# Allegro board adc.brd
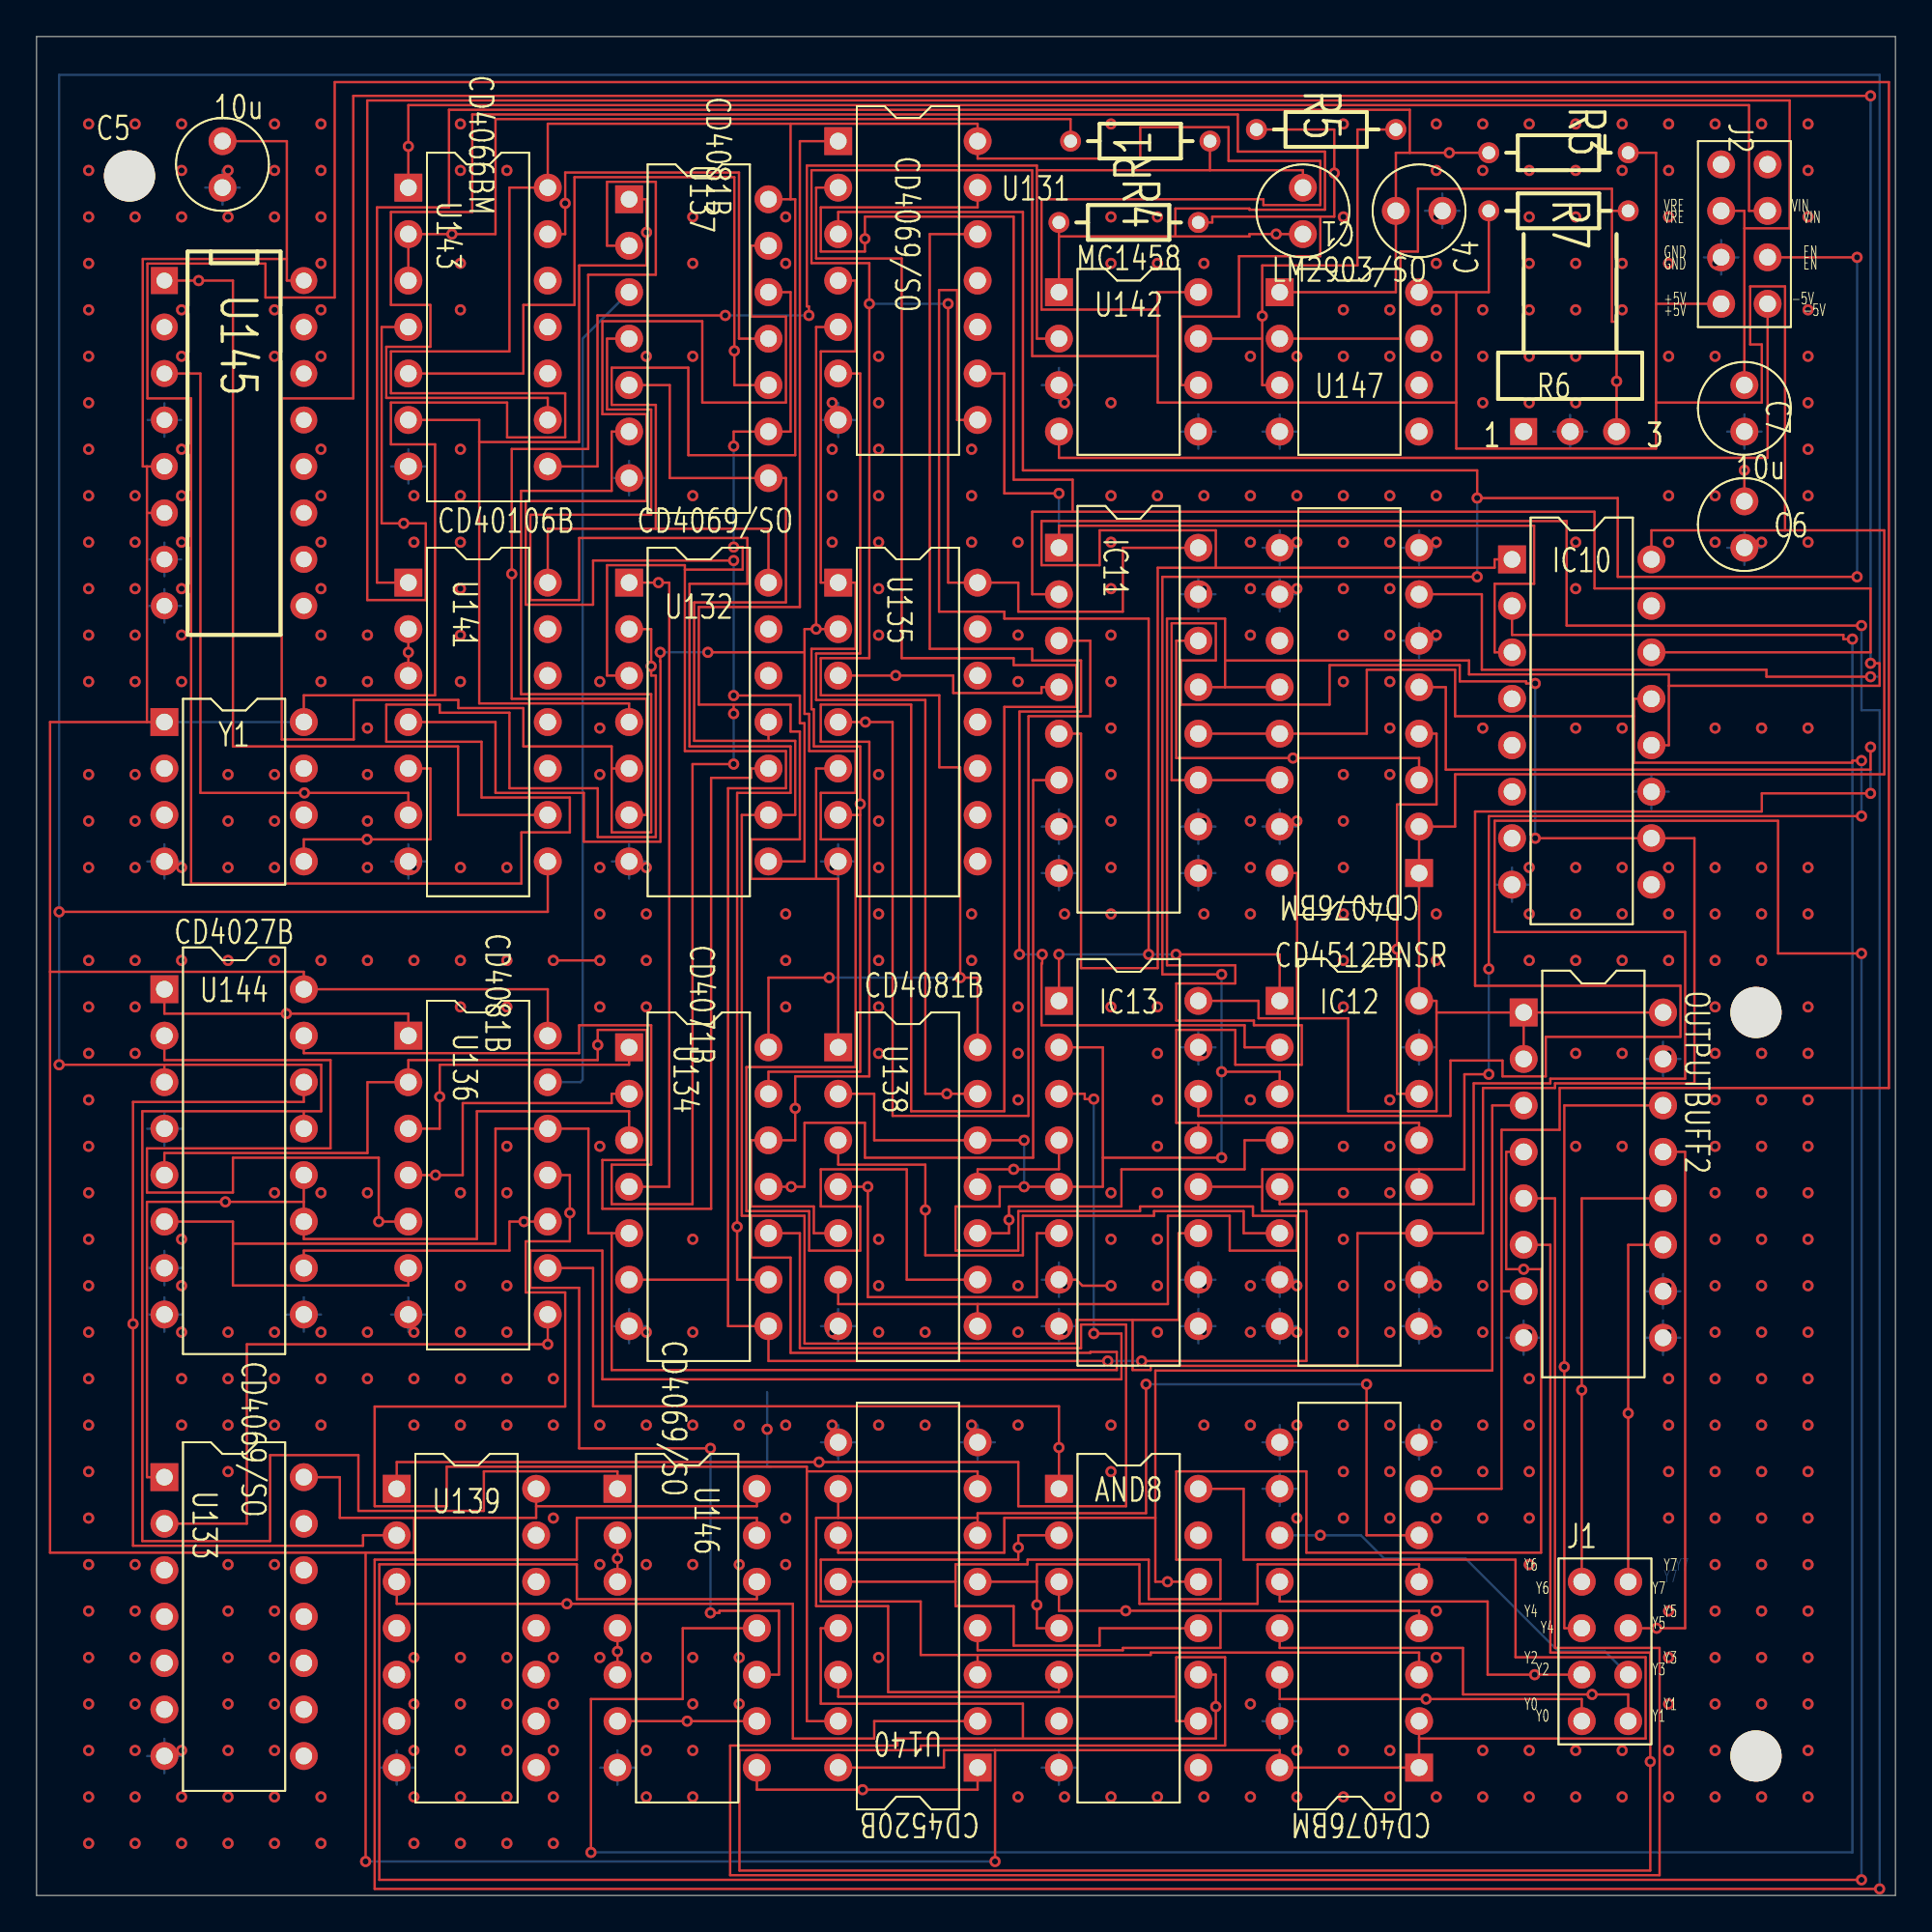
[diagram p0: board, top side]
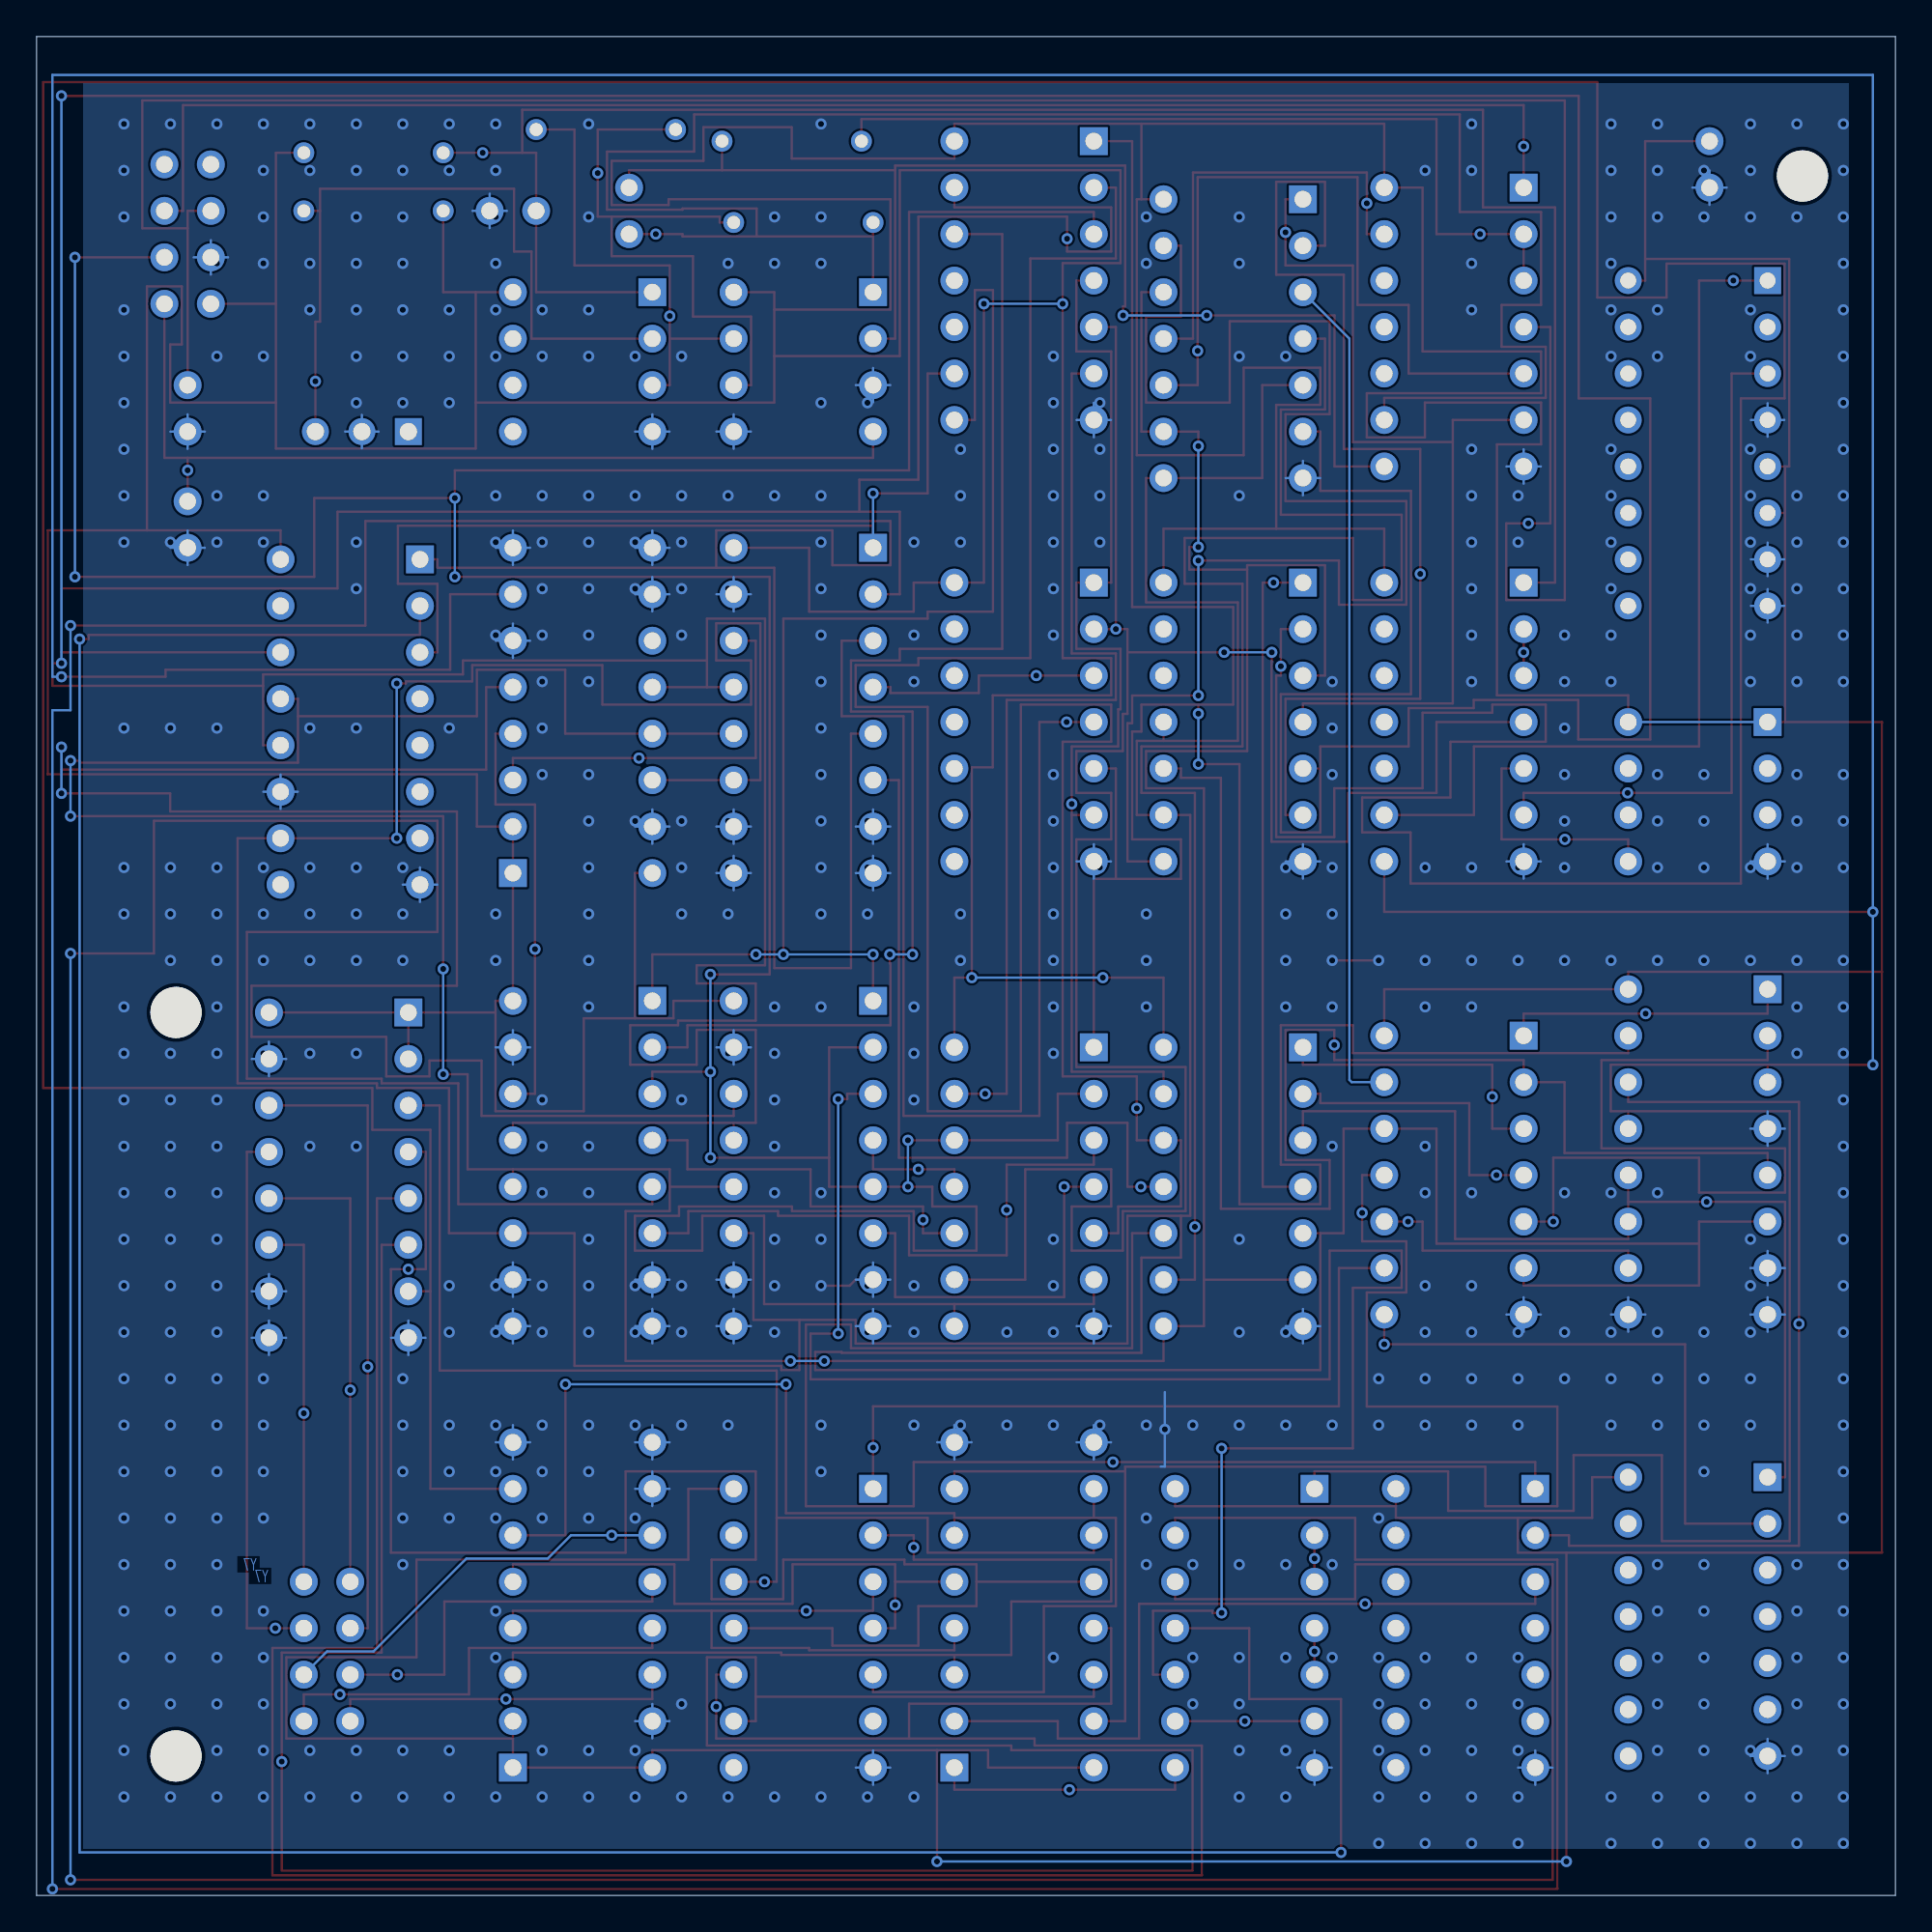
[diagram p1: board, bottom side, seen from below]

Outline 101.6 x 101.6 mm; copper layers: TOP, BOTTOM. Coordinates in mm from the lower left corner of the outline.
Outline path: 0,101.6 101.6,101.6 101.6,0 0,0 0,101.6

## Design rules (mm)
constraint set DEFAULT: min track width 0.127

## Placement (name value [footprint] x y rotation side)
AND8  CD4068BEE4  [DIP14_3]  55.88 22.23 0 top
C1  32n  [CAP196]  69.22 93.34 180 top
C4  15p  [CAP196]  76.83 92.08 90 top
C5  10u  [CAP196]  10.16 93.34 0 top
C6  10u  [CAP196]  93.34 73.66 0 top
C7  10u  [CAP196]  93.34 80.01 0 top
IC10  CD4028BEE4  [DIP16_3]  80.64 73.03 0 top
IC11  CD4512BNSR  [DIP16_3]  55.88 73.66 0 top
IC12  CD4512BNSR  [DIP16_3]  67.94 48.9 0 top
IC13  CD4512BNSR  [DIP16_3]  55.88 48.9 0 top
J1  8 HEADER  [JUMPER8]  84.45 9.53 0 top
J2  8 HEADER  [JUMPER8]  92.08 87 0 top
OUTPUTBUFF1  CD4076BM  [DIP16_3]  75.56 6.99 180 top
OUTPUTBUFF2  CD4076BM  [DIP16_3]  81.28 48.26 0 top
R1  100k  [AXRC05]  64.14 95.89 180 top
R3  1k  [AXRC05]  79.38 95.25 0 top
R4  1k  [AXRC05]  55.88 91.44 0 top
R5  1k  [AXRC05]  66.67 96.52 0 top
R6  POT2K  [BLKCON100RHTM1SQW4253]  81.28 80.01 0 top
R7  200k  [AXRC05]  79.38 92.08 0 top
STATEBUFF1  CD4076BM  [DIP16_3]  75.56 55.88 180 top
U131  CD4069/SO  [DIP14_3]  43.81 95.89 0 top
U132  CD4069/SO  [DIP14_3]  32.38 71.75 0 top
U133  CD4069/SO  [DIP14_3]  6.99 22.86 0 top
U134  CD4071B  [DIP14_3]  32.38 46.35 0 top
U135  CD4071B  [DIP14_3]  43.81 71.75 0 top
U136  CD4081B  [DIP14_3]  20.32 46.99 0 top
U137  CD4081B  [DIP14_3]  32.38 92.71 0 top
U138  CD4081B  [DIP14_3]  43.81 46.35 0 top
U139  CD4081B  [DIP14_3]  19.68 22.23 0 top
U140  CD4520B  [DIP16_3]  51.44 6.99 180 top
U141  CD40106B  [DIP14_3]  20.32 71.75 0 top
U142  MC1458  [DIP8_3]  55.88 87.63 0 top
U143  CD4066BM  [DIP14_3]  20.32 93.34 0 top
U144  CD4027B  [DIP16_3]  6.99 49.53 0 top
U145  CD4027B  [DIP10016W300L825]  6.99 88.27 270 top
U146  CD4069/SO  [DIP14_3]  31.75 22.23 0 top
U147  LM2903/SO  [DIP8_3]  67.94 87.63 0 top
UNK#REFDES  -  [unnamed]  93.98 7.62 0 top
UNK#REFDES#2  -  [unnamed]  5.08 93.98 0 top
UNK#REFDES#3  -  [unnamed]  93.98 48.26 0 top
Y1  OSC14A  [DIP8_3]  6.99 64.14 0 top

## Library data of the parts
AND8 = CD4068BEE4: Tolerance: ***; User Part Number: ***
C1 C4-C7 = C: Tolerance: ***; User Part Number: ***
IC10 = CD4028BEE4: Tolerance: ***; User Part Number: ***
IC11-IC13 = CD4512BNSR: Tolerance: ***; User Part Number: ***
J1 J2 = 8 HEADER: User Part Number: ***
OUTPUTBUFF1 OUTPUTBUFF2 STATEBUFF1 = CD4076BM: Tolerance: ***; User Part Number: ***
R1 R3-R5 R7 = R
R6 = POT/SM
U131 = CD4069/SO_8: Tolerance: ***; User Part Number: ***
U132 = CD4069/SO_7: Tolerance: ***; User Part Number: ***
U133 = CD4069/SO_9: Tolerance: ***; User Part Number: ***
U134 U135 = CD4071B_1: Tolerance: ***; User Part Number: ***
U136-U139 = CD4081B_0: Tolerance: ***; User Part Number: ***
U140 = CD4520B_2: Tolerance: ***; User Part Number: ***
U141 = CD40106B_2: Tolerance: ***; User Part Number: ***
U142 = MC1458_2: Tolerance: ***; User Part Number: ***
U143 = CD4066BM_2: Tolerance: ***; User Part Number: ***
U144 = CD4027B_3: Tolerance: ***; User Part Number: ***
U145 = CD4027B_3
U146 = CD4069/SO_10: Tolerance: ***; User Part Number: ***
U147 = LM2903/SO: Tolerance: ***; User Part Number: ***
Y1 = OSC14A_1: Tolerance: ***; User Part Number: ***

## Footprints (pads in the part's own frame, mm; a bottom-side part is the same pattern mirrored in y, then rotated)
AXRC05
  round 1.143 hole 0.711: 1(0,0) 2(7.62,0)
BLKCON100RHTM1SQW4253
  rect 1.473x1.473 hole 0.94: 1(0,0)
  round 1.473 hole 0.94: 2(2.54,0) 3(5.08,0)
CAP196
  round 1.524 hole 0.914: 1(0,0) 2(0,2.54)
DIP8_3
  rect 1.524x1.524 hole 0.914: 1(0,0)
  round 1.524 hole 0.914: 2(0,-2.54) 3(0,-5.08) 4(0,-7.62) 5(7.62,-7.62) 6(7.62,-5.08) 7(7.62,-2.54) 8(7.62,0)
DIP14_3
  rect 1.524x1.524 hole 0.914: 1(0,0)
  round 1.524 hole 0.914: 2(0,-2.54) 3(0,-5.08) 4(0,-7.62) 5(0,-10.16) 6(0,-12.7) 7(0,-15.24) 8(7.62,-15.24) 9(7.62,-12.7) 10(7.62,-10.16) 11(7.62,-7.62) 12(7.62,-5.08) 13(7.62,-2.54) 14(7.62,0)
DIP16_3
  rect 1.524x1.524 hole 0.914: 1(0,0)
  round 1.524 hole 0.914: 2(0,-2.54) 3(0,-5.08) 4(0,-7.62) 5(0,-10.16) 6(0,-12.7) 7(0,-15.24) 8(0,-17.78) 9(7.62,-17.78) 10(7.62,-15.24) 11(7.62,-12.7) 12(7.62,-10.16) 13(7.62,-7.62) 14(7.62,-5.08) 15(7.62,-2.54) 16(7.62,0)
DIP10016W300L825
  rect 1.473x1.473 hole 0.864: 1(0,0)
  round 1.473 hole 0.864: 2(2.54,0) 3(5.08,0) 4(7.62,0) 5(10.16,0) 6(12.7,0) 7(15.24,0) 8(17.78,0) 9(17.78,7.62) 10(15.24,7.62) 11(12.7,7.62) 12(10.16,7.62) 13(7.62,7.62) 14(5.08,7.62) 15(2.54,7.62) 16(0,7.62)
JUMPER8
  round 1.524 hole 0.914: 1(0,0) 2(2.54,0) 3(0,2.54) 4(2.54,2.54) 5(0,5.08) 6(2.54,5.08) 7(0,7.62) 8(2.54,7.62)
unnamed
  round 2.794 hole 2.794: 1(0,0)

## Nets
VDD: AND8.14 C5.2 IC10.16 IC11.16 IC12.16 IC13.16 J2.1 OUTPUTBUFF1.1 OUTPUTBUFF1.2 OUTPUTBUFF1.16 OUTPUTBUFF2.1 OUTPUTBUFF2.2 OUTPUTBUFF2.16 R3.2 R7.1 STATEBUFF1.1 STATEBUFF1.2 STATEBUFF1.16 U131.14 U132.14 U133.14 U134.14 U135.14 U136.14 U137.14 U138.14 U139.14 U140.16 U141.14 U142.8 U143.14 U144.16 U145.5 U145.6 U145.16 U146.14 U147.8 Y1.1 Y1.8
VIN: J2.6 U143.1
VSS: C6.2 J2.2 U142.4
0: AND8.7(VSS) C4.1 C5.1 C6.1 C7.1 IC10.8(VSS) IC10.11 IC11.7 IC11.8(VSS) IC11.9 IC11.10 IC11.15 IC12.7 IC12.8(VSS) IC12.9 IC12.10 IC12.15 IC13.7 IC13.8(VSS) IC13.9 IC13.10 IC13.15 J2.3 OUTPUTBUFF1.8(VSS) OUTPUTBUFF1.9 OUTPUTBUFF1.10 OUTPUTBUFF1.15 OUTPUTBUFF2.8(VSS) OUTPUTBUFF2.9 OUTPUTBUFF2.10 OUTPUTBUFF2.15 R6.2(WIPER) STATEBUFF1.6 STATEBUFF1.8(VSS) STATEBUFF1.9 STATEBUFF1.10 STATEBUFF1.15 U131.7 U132.7 U133.7 U134.7 U135.7 U136.7 U137.7 U138.7 U139.7 U140.8 U140.9 U141.7 U142.3 U142.5 U143.7 U144.4 U144.7 U144.8 U144.9(S) U145.4 U145.7 U145.8 U146.7 U147.4 Y1.4
A: AND8.1 U136.9
ARISE: U131.1 U135.5 U138.1 U144.15
CLK: STATEBUFF1.7 U141.8 U144.3 U144.13 U146.1
CLK_EN_OVERIDE: U139.2 U144.14
I0: U137.11(O) U143.13
I1: U137.10 U143.5
MEAS: U134.10 U139.1
N0: IC11.14 STATEBUFF1.3
N1: IC12.14 STATEBUFF1.4
N2: IC13.14 STATEBUFF1.5
NARISE: U131.2 U134.12 U138.5
NC1: Y1.2
NC2: Y1.3
NC3: Y1.6
NC4: Y1.7
NP: U131.6 U138.13
NT: U131.4 U134.13 U135.1 U135.6
NX2: IC11.3 U135.4
NX3: IC11.4 U135.3
NX5: IC11.6 U134.11(O)
NY0: IC12.1 IC13.1 U131.8
NY1: IC12.2 U131.12(Y)
NY3: IC12.4 U138.10
NY4: IC12.5 U146.12(Y)
NY5: IC12.6 U138.3
NZ2: IC13.3 U146.10
NZ3: IC13.4 U138.11(O)
NZ5: IC13.6 U138.4
P: U131.5 U135.2 U138.9 U141.4
Q0: AND8.2 OUTPUTBUFF1.3 U140.3
Q1: AND8.3 OUTPUTBUFF1.4 U140.4
Q2: AND8.4 OUTPUTBUFF1.5 U140.5
Q3: AND8.5 OUTPUTBUFF1.6 U140.6 U140.10
Q4: AND8.12 OUTPUTBUFF2.3 U140.11
Q5: AND8.11 OUTPUTBUFF2.4 U140.12
Q6: AND8.10 OUTPUTBUFF2.5 U140.13
Q7: AND8.9 OUTPUTBUFF2.6 U140.14
RST_CNT: U136.11(O) U140.7 U140.15(RST)
RST_IN: U132.4 U137.1 U143.6
S0: IC10.10 IC11.11 IC12.11 IC13.11 STATEBUFF1.14 U132.9 U132.11 U134.5 U136.6 U136.12 U137.5 U137.8 U144.6
S0CHANGE: U133.1 U134.3 U144.11 U144.12
S1: IC10.13 IC11.12 IC12.12 IC13.12 STATEBUFF1.13 U132.3 U134.6 U134.8 U137.9 U137.12
S2: IC10.12 IC11.13 IC12.13 IC13.13 STATEBUFF1.12 U132.5 U137.6
SB0: IC10.3 IC11.1 U131.9
SB1: IC10.14 IC11.2 U131.13
SB2: IC10.2 U146.11
SB4: IC10.1 IC11.5 U146.13
T: IC12.3 IC13.2 IC13.5 J2.4 U131.3 U138.2 U138.6 U138.8 U138.12
VREF: C7.2 J2.5 U143.4
WR: OUTPUTBUFF1.7 OUTPUTBUFF2.7 U132.2
Y0: J1.1 OUTPUTBUFF1.14
Y1: J1.2 OUTPUTBUFF1.13
Y2: J1.3 OUTPUTBUFF1.12
Y3: J1.4 OUTPUTBUFF1.11
Y4: J1.5 OUTPUTBUFF2.14
Y5: J1.6 OUTPUTBUFF2.13
Y6: J1.7 OUTPUTBUFF2.12
Y7: J1.8 OUTPUTBUFF2.11
N01906: C1.1 R1.1 U142.2 U143.8
N01917: C1.2 R4.1 U142.1 U143.9
N29993: R1.2 U143.2 U143.3
N201913: C4.2 R3.1 U141.1 U147.1
N291780: R5.2 U142.7(OUT) U147.3
N294365: R4.2 R5.1 U142.6
N364495: U136.1 U144.1
N364545: U134.1 U136.3
N364621: U132.10 U136.2 U144.5
N364729: U134.2 U136.4
N365115: U136.10 U144.10
N365523: U136.13 U137.3
N365667: U132.6 U137.2
N365843: U134.9 U137.4
N366199: U132.8 U137.13
N383512: U140.1 U146.8
N414529: U132.1 U134.4
N426095: U139.3 U140.2
N434393: U141.6 U145.3
N449503: U141.2 U141.3
N452189: U141.9 U145.1
N453800: U136.5 U144.2
N497810: R6.3 R7.2 U147.2
N501202: U146.2 U146.3
N521218: U141.5 Y1.5(OUT)
N4034561: U133.2 U136.8
N4911441: U146.4 U146.5
N4912191: U146.6 U146.9

Pads without a net: AND8 6 8 13; IC10 4 5 6 7 9 15; J2 7 8; R6 1; STATEBUFF1 11; U131 10 11; U132 12 13; U133 3 4 5 6 8 9 10 11 12 13; U135 8 9 10 11 12 13; U139 4 5 6 8 9 10 11 12 13; U141 10 11 12 13; U143 10 11 12; U145 2 9 10 11 12 13 14 15; U147 5 6 7; UNK#REFDES 1; UNK#REFDES#2 1; UNK#REFDES#3 1

## Via types
v1: diameter 0.61, hole 0.33, TOP to BOTTOM, 717 vias

## Routing (per net, layer and track width the routed paths; a pad name or vN(x,y) marks a point on that pad's centre or on a via; arc(x,y) is an arc through that point)
VDD: length 908.9
  TOP w0.127: 61.28,84.14 61.28,81.6 77.6,81.6 ; 61.28,84.14 54.42,84.14 54.42,94.3 42.35,94.3 42.35,89.22 45.52,89.22 v1(45.52,87) 45.52,67.63 42.86,67.63 42.86,65.6 49.34,65.6 49.34,61.66 50.48,61.66 v1(50.48,50.16) 51.44,50.16 51.44,46.35 ; 61.28,84.14 61.28,86.68 ; 95.57,74.61 95.57,87.95 93.66,87.95 93.66,84.77 94.3,84.77 94.3,81.6 88.52,81.6 ; 95.57,74.61 88.27,74.61 IC10.16 ; 95.57,74.61 100.99,74.61 100.99,61.28 77.53,61.28 77.53,58.42 STATEBUFF1.2 STATEBUFF1.1 IC12.16 76.52,48.9 76.52,48.26 ; U134.14 40.01,50.16 v1(43.32,50.16) ; 61.28,86.68 61.28,87.63 U142.8 ; 61.28,86.68 54.93,86.68 54.93,92.71 67.06,92.71 67.06,92.39 70.17,92.39 70.17,94.81 65.15,94.81 65.15,96.65 60.33,96.65 60.33,94.93 51.44,94.93 51.44,96.84 41.21,96.84 ; 6.03,78.11 5.8,78.11 5.8,89.45 13.68,89.45 ; 6.03,78.11 6.03,75.56 ; 6.03,78.11 6.99,78.11 ; 75.56,8.57 OUTPUTBUFF1.1 67.94,6.99 67.94,7.94 52.39,7.94 ; 75.56,8.57 OUTPUTBUFF1.2 ; 75.56,8.57 87.95,8.57 87.95,13.02 80.84,13.02 80.84,18.35 65.98,18.35 65.98,22.23 AND8.14 ; 52.39,7.94 49.59,7.94 49.59,6.99 43.81,6.99 ; 52.39,7.94 v1(52.39,1.85) ; 0.74,50.48 14.61,50.48 U144.16 27.94,49.53 U136.14 ; 0.74,50.48 0.74,18.73 17.98,18.73 ; 0.74,50.48 0.74,64.14 6.03,64.14 ; v1(17.98,1.85) 17.98,18.73 ; 17.98,18.73 20.64,18.73 20.64,20.64 ; Y1.8 14.61,65.6 21.78,65.6 21.78,79.31 19.37,79.31 19.37,81.6 25.72,81.6 25.72,79.69 28.89,79.69 28.89,82.11 19.37,82.11 19.37,84.39 25.84,84.39 25.84,93.34 U143.14 27.94,96.84 41.21,96.84 ; 6.03,64.14 6.03,75.56 ; 6.03,64.14 Y1.1 ; IC13.16 66.79,48.9 66.79,47.94 68.9,47.94 ; 41.21,92.71 41.21,96.84 ; 41.21,92.71 41.47,92.71 41.47,78.72 35.62,78.72 35.62,83.5 31.43,83.5 31.43,81.47 33.85,81.47 33.85,74.7 ; 41.21,92.71 U137.14 ; C5.2 13.68,95.89 13.68,89.45 ; 13.68,89.45 13.68,88.27 U145.16 ; U146.14 39.37,21.27 27.3,21.27 ; OUTPUTBUFF2.1 76.52,48.26 ; OUTPUTBUFF2.1 OUTPUTBUFF2.16 ; OUTPUTBUFF2.1 OUTPUTBUFF2.2 ; 76.52,48.26 76.52,42.86 71.69,42.86 71.69,47.94 68.9,47.94 ; U147.8 77.6,87.63 ; 77.6,87.63 77.6,81.6 ; 77.6,87.63 79.38,87.63 R7.1 ; 88.52,81.6 88.52,87 ; 88.52,81.6 88.52,79.08 77.6,79.08 77.6,81.6 ; 88.52,87 88.52,95.25 R3.2 ; 88.52,87 J2.1 ; 6.03,75.56 6.99,75.56 ; U141.14 27.94,74.7 33.85,74.7 ; 68.9,47.94 68.9,55.88 STATEBUFF1.16 ; 20.64,20.64 16.57,20.64 16.57,22.86 U133.14 ; 20.64,20.64 27.3,20.64 27.3,21.27 ; IC11.16 59.37,73.66 59.37,70.17 53.66,70.17 53.66,71.75 49.82,71.75 v1(49.82,87) ; 33.85,74.7 40.01,74.7 U132.14 ; 27.3,21.27 U139.14
  BOTTOM w0.127: v1(52.39,1.85) v1(17.98,1.85) ; v1(49.82,87) v1(45.52,87) ; Y1.1 Y1.8 ; v1(43.32,50.16) v1(50.48,50.16)
VIN: length 84.6
  TOP w0.127: J2.6 93.6,92.08 93.6,97.85 20.32,97.85 v1(20.32,95.6) U143.1
VSS: length 51
  TOP w0.127: J2.2 94.61,78.57 93.34,78.57 ; C6.2 v1(93.34,77.9) 93.34,78.57 ; U142.4 55.88,78.57 93.34,78.57
0: length 242.6
  TOP w0.127: IC13.7 56.83,33.66 57.16,33.32 v1(58.72,33.32) ; v1(28.24,51.1) v1(30.78,51.1)
  BOTTOM w0.127: 67,71.12 STATEBUFF1.10 ; STATEBUFF1.10 67.94,70.18 ; STATEBUFF1.10 67.94,72.06 ; STATEBUFF1.10 68.89,71.12 ; 75.56,30.17 IC12.9 ; IC12.9 74.62,31.11 ; IC12.9 75.56,32.06 ; IC12.9 76.51,31.11 ; J2.3 93.02,89.53 ; J2.3 92.08,90.48 ; J2.3 92.08,88.59 ; J2.3 91.13,89.53 ; IC13.7 55.88,34.6 ; IC13.7 55.88,32.71 ; IC13.7 56.82,33.66 ; IC13.7 54.94,33.66 ; 67,58.42 STATEBUFF1.15 ; STATEBUFF1.15 67.94,57.48 ; STATEBUFF1.15 68.89,58.42 ; STATEBUFF1.15 67.94,59.36 ; 76.83,91.13 C4.1 ; C4.1 76.83,93.02 ; C4.1 77.78,92.08 ; C4.1 75.89,92.08 ; 18.74,6.99 19.68,6.99 ; 19.68,6.99 20.63,6.99 ; 19.68,6.99 19.68,7.93 ; 19.68,6.99 19.68,6.04 ; 67,24.77 OUTPUTBUFF1.9 ; OUTPUTBUFF1.9 67.94,25.71 ; OUTPUTBUFF1.9 68.89,24.77 ; OUTPUTBUFF1.9 67.94,23.82 ; U136.7 21.26,31.75 ; U136.7 19.38,31.75 ; U136.7 20.32,32.69 ; U136.7 20.32,30.81 ; 6.99,6.68 U133.7 ; U133.7 6.04,7.62 ; U133.7 6.99,8.56 ; U133.7 7.93,7.62 ; OUTPUTBUFF2.15 88.9,46.66 ; OUTPUTBUFF2.15 88.9,44.78 ; OUTPUTBUFF2.15 89.84,45.72 ; OUTPUTBUFF2.15 87.96,45.72 ; IC11.10 63.5,59.36 ; IC11.10 64.44,58.42 ; IC11.10 62.56,58.42 ; IC11.10 63.5,57.48 ; 62.56,31.11 IC13.9 ; IC13.9 63.5,32.06 ; IC13.9 63.5,30.17 ; IC13.9 64.44,31.11 ; 42.87,24.77 U140.9 ; U140.9 43.81,23.82 ; U140.9 43.81,25.71 ; U140.9 44.76,24.77 ; 67.94,9.53 68.89,9.53 ; 67.94,9.53 67.94,8.58 ; 67.94,9.53 67,9.53 ; 67.94,9.53 67.94,10.47 ; Y1.4 7.93,56.52 ; Y1.4 6.99,57.46 ; Y1.4 6.04,56.52 ; Y1.4 6.99,55.57 ; R6.2 83.82,80.92 ; R6.2 82.91,80.01 ; R6.2 84.73,80.01 ; R6.2 83.82,79.1 ; OUTPUTBUFF1.10 67.94,23.17 ; OUTPUTBUFF1.10 67.94,21.28 ; OUTPUTBUFF1.10 67,22.23 ; OUTPUTBUFF1.10 68.89,22.23 ; U144.4 7.93,41.91 ; U144.4 6.99,42.85 ; U144.4 6.99,40.97 ; U144.4 6.04,41.91 ; 51.44,23.82 U140.8 ; U140.8 52.38,24.77 ; U140.8 51.44,25.71 ; U140.8 50.49,24.77 ; 40.15,23.44 39.93,23.44 v1(39.93,25.48) 39.93,27.51 ; 55.88,81.61 U142.3 ; U142.3 56.82,82.55 ; U142.3 55.88,83.49 ; U142.3 54.94,82.55 ; IC10.11 88.27,61.27 ; IC10.11 88.27,59.38 ; IC10.11 87.32,60.33 ; IC10.11 89.21,60.33 ; IC13.10 63.5,34.6 ; IC13.10 62.56,33.66 ; IC13.10 63.5,32.71 ; IC13.10 64.44,33.66 ; 9.22,93.34 C5.1 ; C5.1 10.16,94.29 ; C5.1 10.16,92.4 ; C5.1 11.1,93.34 ; 33.33,31.11 32.38,31.11 ; 32.38,31.11 32.38,30.17 ; 32.38,31.11 32.38,32.06 ; 32.38,31.11 31.44,31.11 ; IC13.8 56.82,31.11 ; IC13.8 54.94,31.11 ; IC13.8 55.88,30.17 ; IC13.8 55.88,32.06 ; 31.44,77.47 U137.7 ; U137.7 32.38,78.41 ; U137.7 33.33,77.47 ; U137.7 32.38,76.53 ; IC12.10 75.56,34.6 ; IC12.10 74.62,33.66 ; IC12.10 76.51,33.66 ; IC12.10 75.56,32.71 ; 62.56,55.88 IC11.9 ; IC11.9 63.5,56.82 ; IC11.9 63.5,54.94 ; IC11.9 64.44,55.88 ; 6.99,69.57 6.99,70.48 ; 6.99,70.48 7.9,70.48 ; 6.99,70.48 6.07,70.48 ; 6.99,70.48 6.99,71.4 ; 55.88,57.48 IC11.7 ; IC11.7 54.94,58.42 ; IC11.7 55.88,59.36 ; IC11.7 56.82,58.42 ; IC11.15 64.44,71.12 ; IC11.15 63.5,72.06 ; IC11.15 63.5,70.18 ; IC11.15 62.56,71.12 ; U142.5 63.5,80.95 ; U142.5 62.56,80.01 ; U142.5 63.5,79.07 ; U142.5 64.44,80.01 ; 75.56,72.72 STATEBUFF1.8 ; STATEBUFF1.8 75.56,74.6 ; STATEBUFF1.8 74.62,73.66 ; STATEBUFF1.8 76.51,73.66 ; 67.94,79.07 U147.4 ; U147.4 67.94,80.95 ; U147.4 68.89,80.01 ; U147.4 67,80.01 ; 75.56,23.82 OUTPUTBUFF1.8 ; OUTPUTBUFF1.8 76.51,24.77 ; OUTPUTBUFF1.8 75.56,25.71 ; OUTPUTBUFF1.8 74.62,24.77 ; 55.88,6.99 56.82,6.99 ; 55.88,6.99 54.94,6.99 ; 55.88,6.99 55.88,6.04 ; 55.88,6.99 55.88,7.93 ; 31.75,6.04 31.75,6.99 ; 31.75,6.99 32.69,6.99 ; 31.75,6.99 30.81,6.99 ; 31.75,6.99 31.75,7.93 ; C7.1 93.34,80.95 ; C7.1 92.4,80.01 ; C7.1 93.34,79.07 ; C7.1 94.29,80.01 ; 80.64,54.3 80.64,55.24 ; 80.64,55.24 80.64,56.19 ; 80.64,55.24 81.59,55.24 ; 80.64,55.24 79.7,55.24 ; 43.81,31.11 44.76,31.11 ; 43.81,31.11 43.81,30.17 ; 43.81,31.11 42.87,31.11 ; 43.81,31.11 43.81,32.06 ; 6.04,34.29 U144.7 ; U144.7 6.99,35.23 ; U144.7 7.93,34.29 ; U144.7 6.99,33.35 ; 74.62,46.35 IC12.15 ; IC12.15 75.56,45.41 ; IC12.15 76.51,46.35 ; IC12.15 75.56,47.3 ; 6.07,73.03 6.99,73.03 ; 6.99,73.03 6.99,72.11 ; 6.99,73.03 7.9,73.03 ; 6.99,73.03 6.99,73.94 ; 81.28,29.54 OUTPUTBUFF2.8 ; OUTPUTBUFF2.8 80.34,30.48 ; OUTPUTBUFF2.8 81.28,31.42 ; OUTPUTBUFF2.8 82.22,30.48 ; 67,73.66 STATEBUFF1.9 ; STATEBUFF1.9 68.89,73.66 ; STATEBUFF1.9 67.94,72.72 ; STATEBUFF1.9 67.94,74.6 ; IC11.8 56.82,55.88 ; IC11.8 55.88,56.82 ; IC11.8 55.88,54.94 ; IC11.8 54.94,55.88 ; 43.81,80.64 43.81,81.59 ; 43.81,80.64 42.87,80.64 ; 43.81,80.64 43.81,79.7 ; 43.81,80.64 44.76,80.64 ; 87.96,33.02 OUTPUTBUFF2.10 ; OUTPUTBUFF2.10 88.9,32.08 ; OUTPUTBUFF2.10 89.84,33.02 ; OUTPUTBUFF2.10 88.9,33.96 ; 43.81,55.57 43.81,56.52 ; 43.81,56.52 42.87,56.52 ; 43.81,56.52 43.81,57.46 ; 43.81,56.52 44.76,56.52 ; IC12.7 67.94,34.6 ; IC12.7 68.89,33.66 ; IC12.7 67,33.66 ; IC12.7 67.94,32.71 ; 93.34,72.72 C6.1 ; C6.1 93.34,74.6 ; C6.1 94.29,73.66 ; C6.1 92.4,73.66 ; 75.56,67.64 STATEBUFF1.6 ; STATEBUFF1.6 74.62,68.58 ; STATEBUFF1.6 75.56,69.52 ; STATEBUFF1.6 76.51,68.58 ; U144.8 7.93,31.75 ; U144.8 6.04,31.75 ; U144.8 6.99,32.69 ; U144.8 6.99,30.81 ; IC12.8 68.89,31.11 ; IC12.8 67.94,30.17 ; IC12.8 67,31.11 ; IC12.8 67.94,32.06 ; 19.38,56.52 20.32,56.52 ; 20.32,56.52 20.32,57.46 ; 20.32,56.52 21.26,56.52 ; 20.32,56.52 20.32,55.57 ; 6.99,80.64 6.99,81.56 ; 6.99,80.64 6.99,79.73 ; 6.99,80.64 6.07,80.64 ; 6.99,80.64 7.9,80.64 ; 63.5,45.41 IC13.15 ; IC13.15 63.5,47.3 ; IC13.15 62.56,46.35 ; IC13.15 64.44,46.35 ; 32.38,55.57 32.38,56.52 ; 32.38,56.52 32.38,57.46 ; 32.38,56.52 31.44,56.52 ; 32.38,56.52 33.33,56.52 ; 14.61,30.81 U144.9 ; U144.9 13.66,31.75 ; U144.9 15.55,31.75 ; U144.9 14.61,32.69 ; 88.9,29.54 OUTPUTBUFF2.9 ; OUTPUTBUFF2.9 88.9,31.42 ; OUTPUTBUFF2.9 89.84,30.48 ; OUTPUTBUFF2.9 87.96,30.48 ; U143.7 21.26,78.11 ; U143.7 20.32,79.05 ; U143.7 19.38,78.11 ; U143.7 20.32,77.16
  vias: v1(2.84,96.82) v1(2.84,94.28) v1(2.84,91.74) v1(2.84,89.2) v1(2.84,86.66) v1(2.84,84.12) v1(2.84,81.58) v1(2.84,79.04) v1(2.84,76.5) v1(2.84,73.96) v1(2.84,71.42) v1(2.84,68.88) v1(2.84,66.34) v1(2.84,61.26) v1(2.84,58.72) v1(2.84,56.18) v1(2.84,51.1) v1(2.84,48.56) v1(2.84,46.02) v1(2.84,43.48) v1(2.84,40.94) v1(2.84,38.4) v1(2.84,35.86) v1(2.84,33.32) v1(2.84,30.78) v1(2.84,28.24) v1(2.84,25.7) v1(2.84,23.16) v1(2.84,20.62) v1(2.84,18.08) v1(2.84,15.54) v1(2.84,13) v1(2.84,10.46) v1(2.84,7.92) v1(2.84,5.38) v1(2.84,2.84) v1(5.38,96.82) v1(5.38,91.74) v1(5.38,76.5) v1(5.38,73.96) v1(5.38,71.42) v1(5.38,68.88) v1(5.38,66.34) v1(5.38,61.26) v1(5.38,58.72) v1(5.38,56.18) v1(5.38,51.1) v1(5.38,48.56) v1(5.38,46.02) v1(5.38,18.08) v1(5.38,15.54) v1(5.38,13) v1(5.38,10.46) v1(5.38,7.92) v1(5.38,5.38) v1(5.38,2.84) v1(7.92,96.82) v1(7.92,94.28) v1(7.92,91.74) v1(7.92,86.66) v1(7.92,84.12) v1(7.92,79.04) v1(7.92,76.5) v1(7.92,73.96) v1(7.92,71.42) v1(7.92,68.88) v1(7.92,66.34) v1(7.92,56.18) v1(7.92,51.1) v1(7.92,35.86) v1(7.92,33.32) v1(7.92,30.78) v1(7.92,28.24) v1(7.92,25.7) v1(7.92,7.92) v1(7.92,5.38) v1(7.92,2.84) v1(10.46,94.28) v1(10.46,91.74) v1(10.46,61.26) v1(10.46,58.72) v1(10.46,56.18) v1(10.46,51.1) v1(10.46,30.78) v1(10.46,28.24) v1(10.46,25.7) v1(10.46,23.16) v1(10.46,18.08) v1(10.46,15.54) v1(10.46,13) v1(10.46,10.46) v1(10.46,7.92) v1(10.46,5.38) v1(10.46,2.84) v1(13,96.82) v1(13,94.28) v1(13,91.74) v1(13,86.66) v1(13,84.12) v1(13,61.26) v1(13,58.72) v1(13,56.18) v1(13,51.1) v1(13,38.4) v1(13,30.78) v1(13,28.24) v1(13,25.7) v1(13,18.08) v1(13,15.54) v1(13,13) v1(13,10.46) v1(13,7.92) v1(13,5.38) v1(13,2.84) v1(15.54,96.82) v1(15.54,94.28) v1(15.54,91.74) v1(15.54,89.2) v1(15.54,86.66) v1(15.54,84.12) v1(15.54,79.04) v1(15.54,76.5) v1(15.54,73.96) v1(15.54,71.42) v1(15.54,68.88) v1(15.54,66.34) v1(15.54,51.1) v1(15.54,38.4) v1(15.54,30.78) v1(15.54,28.24) v1(15.54,25.7) v1(15.54,5.38) v1(15.54,2.84) v1(18.08,68.88) v1(18.08,66.34) v1(18.08,63.8) v1(18.08,61.26) v1(18.08,58.72) v1(18.08,56.18) v1(18.08,51.1) v1(18.08,38.4) v1(18.08,30.78) v1(18.08,28.24) v1(20.62,76.5) v1(20.62,73.96) v1(20.62,56.18) v1(20.62,51.1) v1(20.62,30.78) v1(20.62,28.24) v1(20.62,25.7) v1(20.62,13) v1(20.62,10.46) v1(20.62,7.92) v1(20.62,5.38) v1(20.62,2.84) v1(23.16,96.82) v1(23.16,94.28) v1(23.16,89.2) v1(23.16,86.66) v1(23.16,79.04) v1(23.16,76.5) v1(23.16,73.96) v1(23.16,71.42) v1(23.16,68.88) v1(23.16,66.34) v1(23.16,56.18) v1(23.16,51.1) v1(23.16,48.56) v1(23.16,38.4) v1(23.16,33.32) v1(23.16,30.78) v1(23.16,28.24) v1(23.16,25.7) v1(23.16,13) v1(23.16,10.46) v1(23.16,7.92) v1(23.16,5.38) v1(23.16,2.84) v1(25.7,94.28) v1(25.7,56.18) v1(25.7,51.1) v1(25.7,48.56) v1(25.7,40.94) v1(25.7,38.4) v1(25.7,33.32) v1(25.7,30.78) v1(25.7,28.24) v1(25.7,25.7) v1(25.7,13) v1(25.7,10.46) v1(25.7,7.92) v1(25.7,5.38) v1(25.7,2.84) v1(28.24,28.24) v1(28.24,25.7) v1(28.24,20.62) v1(28.24,13) v1(28.24,10.46) v1(28.24,7.92) v1(28.24,5.38) v1(28.24,2.84) v1(30.78,66.34) v1(30.78,63.8) v1(30.78,61.26) v1(30.78,56.18) v1(30.78,53.64) v1(30.78,48.56) v1(30.78,40.94) v1(30.78,25.7) v1(30.78,18.08) v1(30.78,13) v1(33.32,84.12) v1(33.32,56.18) v1(33.32,53.64) v1(33.32,51.1) v1(33.32,48.56) v1(33.32,30.78) v1(33.32,25.7) v1(33.32,18.08) v1(33.32,13) v1(33.32,7.92) v1(33.32,5.38) v1(35.86,91.74) v1(35.86,89.2) v1(35.86,84.12) v1(35.86,76.5) v1(35.86,35.86) v1(35.86,30.78) v1(35.86,25.7) v1(35.86,18.08) v1(35.86,13) v1(35.86,10.46) v1(35.86,7.92) v1(35.86,5.38) v1(38.4,25.7) v1(38.4,18.08) v1(38.4,13) v1(38.4,10.46) v1(40.94,91.74) v1(40.94,89.2) v1(40.94,53.64) v1(40.94,51.1) v1(40.94,48.56) v1(40.94,25.7) v1(40.94,20.62) v1(40.94,18.08) v1(43.48,81.58) v1(43.48,79.04) v1(43.48,76.5) v1(43.48,73.96) v1(43.48,56.18) v1(43.48,30.78) v1(43.48,25.7) v1(46.02,84.12) v1(46.02,81.58) v1(46.02,79.04) v1(46.02,76.5) v1(46.02,73.96) v1(46.02,71.42) v1(46.02,68.88) v1(46.02,61.26) v1(46.02,58.72) v1(46.02,56.18) v1(46.02,53.64) v1(46.02,51.1) v1(46.02,48.56) v1(46.02,46.02) v1(46.02,35.86) v1(46.02,33.32) v1(46.02,30.78) v1(46.02,25.7) v1(46.02,13) v1(48.56,30.78) v1(48.56,25.7) v1(51.1,79.04) v1(51.1,76.5) v1(51.1,73.96) v1(51.1,53.64) v1(51.1,51.1) v1(51.1,25.7) v1(53.64,73.96) v1(53.64,68.88) v1(53.64,66.34) v1(53.64,48.56) v1(53.64,46.02) v1(53.64,43.48) v1(53.64,33.32) v1(53.64,30.78) v1(53.64,25.7) v1(53.64,5.38) v1(56.18,81.58) v1(56.18,58.72) v1(56.18,56.18) v1(56.18,53.64) v1(56.18,33.32) v1(56.18,30.78) v1(56.18,5.38) v1(58.72,96.82) v1(58.72,91.74) v1(58.72,89.2) v1(58.72,81.58) v1(58.72,76.5) v1(58.72,73.96) v1(58.72,71.42) v1(58.72,68.88) v1(58.72,66.34) v1(58.72,63.8) v1(58.72,61.26) v1(58.72,58.72) v1(58.72,56.18) v1(58.72,53.64) v1(58.72,48.56) v1(58.72,38.4) v1(58.72,35.86) v1(58.72,25.7) v1(58.72,23.16) v1(58.72,5.38) v1(61.26,91.74) v1(61.26,89.2) v1(61.26,76.5) v1(61.26,48.56) v1(61.26,46.02) v1(61.26,43.48) v1(61.26,40.94) v1(61.26,38.4) v1(61.26,35.86) v1(61.26,33.32) v1(61.26,30.78) v1(61.26,5.38) v1(63.8,89.2) v1(63.8,76.5) v1(63.8,71.42) v1(63.8,58.72) v1(63.8,56.18) v1(63.8,53.64) v1(63.8,46.02) v1(63.8,33.32) v1(63.8,30.78) v1(63.8,25.7) v1(63.8,5.38) v1(66.34,84.12) v1(66.34,76.5) v1(66.34,73.96) v1(66.34,71.42) v1(66.34,68.88) v1(66.34,58.72) v1(66.34,56.18) v1(66.34,53.64) v1(66.34,43.48) v1(66.34,33.32) v1(66.34,30.78) v1(66.34,25.7) v1(66.34,10.46) v1(66.34,5.38) v1(68.88,84.12) v1(68.88,76.5) v1(68.88,73.96) v1(68.88,71.42) v1(68.88,58.72) v1(68.88,33.32) v1(68.88,30.78) v1(68.88,25.7) v1(68.88,20.62) v1(68.88,7.92) v1(68.88,5.38) v1(71.42,96.82) v1(71.42,91.74) v1(71.42,86.66) v1(71.42,84.12) v1(71.42,76.5) v1(71.42,73.96) v1(71.42,71.42) v1(71.42,68.88) v1(71.42,66.34) v1(71.42,61.26) v1(71.42,58.72) v1(71.42,56.18) v1(71.42,53.64) v1(71.42,51.1) v1(71.42,48.56) v1(71.42,40.94) v1(71.42,38.4) v1(71.42,35.86) v1(71.42,33.32) v1(71.42,30.78) v1(71.42,25.7) v1(71.42,23.16) v1(71.42,20.62) v1(71.42,7.92) v1(71.42,5.38) v1(73.96,86.66) v1(73.96,84.12) v1(73.96,76.5) v1(73.96,73.96) v1(73.96,71.42) v1(73.96,68.88) v1(73.96,66.34) v1(73.96,63.8) v1(73.96,61.26) v1(73.96,43.48) v1(73.96,40.94) v1(73.96,38.4) v1(73.96,33.32) v1(73.96,30.78) v1(73.96,25.7) v1(73.96,23.16) v1(73.96,20.62) v1(73.96,7.92) v1(73.96,5.38) v1(76.5,96.82) v1(76.5,94.28) v1(76.5,91.74) v1(76.5,89.2) v1(76.5,86.66) v1(76.5,84.12) v1(76.5,76.5) v1(76.5,73.96) v1(76.5,68.88) v1(76.5,53.64) v1(76.5,51.1) v1(76.5,33.32) v1(76.5,30.78) v1(76.5,25.7) v1(76.5,23.16) v1(76.5,20.62) v1(76.5,15.54) v1(76.5,13) v1(76.5,5.38) v1(79.04,96.82) v1(79.04,94.28) v1(79.04,86.66) v1(79.04,84.12) v1(79.04,81.58) v1(79.04,63.8) v1(79.04,33.32) v1(79.04,30.78) v1(79.04,25.7) v1(79.04,23.16) v1(79.04,20.62) v1(79.04,7.92) v1(79.04,5.38) v1(81.58,96.82) v1(81.58,94.28) v1(81.58,91.74) v1(81.58,89.2) v1(81.58,86.66) v1(81.58,84.12) v1(81.58,81.58) v1(81.58,56.18) v1(81.58,53.64) v1(81.58,51.1) v1(81.58,30.78) v1(81.58,28.24) v1(81.58,25.7) v1(81.58,23.16) v1(81.58,20.62) v1(81.58,18.08) v1(81.58,7.92) v1(81.58,5.38) v1(84.12,96.82) v1(84.12,94.28) v1(84.12,91.74) v1(84.12,89.2) v1(84.12,86.66) v1(84.12,84.12) v1(84.12,81.58) v1(84.12,73.96) v1(84.12,71.42) v1(84.12,63.8) v1(84.12,56.18) v1(84.12,53.64) v1(84.12,51.1) v1(84.12,46.02) v1(84.12,40.94) v1(84.12,7.92) v1(84.12,5.38) v1(86.66,96.82) v1(86.66,94.28) v1(86.66,89.2) v1(86.66,86.66) v1(86.66,63.8) v1(86.66,56.18) v1(86.66,53.64) v1(86.66,51.1) v1(86.66,46.02) v1(86.66,40.94) v1(86.66,7.92) v1(86.66,5.38) v1(89.2,96.82) v1(89.2,94.28) v1(89.2,91.74) v1(89.2,89.2) v1(89.2,84.12) v1(89.2,76.5) v1(89.2,73.96) v1(89.2,56.18) v1(89.2,53.64) v1(89.2,51.1) v1(89.2,46.02) v1(89.2,33.32) v1(89.2,30.78) v1(89.2,28.24) v1(89.2,25.7) v1(89.2,23.16) v1(89.2,20.62) v1(89.2,15.54) v1(89.2,13) v1(89.2,10.46) v1(89.2,7.92) v1(89.2,5.38) v1(91.74,96.82) v1(91.74,89.2) v1(91.74,84.12) v1(91.74,76.5) v1(91.74,73.96) v1(91.74,63.8) v1(91.74,56.18) v1(91.74,53.64) v1(91.74,51.1) v1(91.74,48.56) v1(91.74,46.02) v1(91.74,43.48) v1(91.74,40.94) v1(91.74,38.4) v1(91.74,35.86) v1(91.74,33.32) v1(91.74,30.78) v1(91.74,28.24) v1(91.74,25.7) v1(91.74,23.16) v1(91.74,20.62) v1(91.74,18.08) v1(91.74,15.54) v1(91.74,13) v1(91.74,10.46) v1(91.74,7.92) v1(91.74,5.38) v1(94.28,96.82) v1(94.28,73.96) v1(94.28,63.8) v1(94.28,56.18) v1(94.28,53.64) v1(94.28,51.1) v1(94.28,46.02) v1(94.28,43.48) v1(94.28,40.94) v1(94.28,38.4) v1(94.28,35.86) v1(94.28,33.32) v1(94.28,30.78) v1(94.28,28.24) v1(94.28,25.7) v1(94.28,23.16) v1(94.28,20.62) v1(94.28,18.08) v1(94.28,15.54) v1(94.28,13) v1(94.28,10.46) v1(94.28,5.38) v1(96.82,96.82) v1(96.82,94.28) v1(96.82,91.74) v1(96.82,86.66) v1(96.82,84.12) v1(96.82,81.58) v1(96.82,79.04) v1(96.82,76.5) v1(96.82,73.96) v1(96.82,63.8) v1(96.82,56.18) v1(96.82,53.64) v1(96.82,48.56) v1(96.82,46.02) v1(96.82,43.48) v1(96.82,40.94) v1(96.82,38.4) v1(96.82,35.86) v1(96.82,33.32) v1(96.82,30.78) v1(96.82,28.24) v1(96.82,25.7) v1(96.82,23.16) v1(96.82,20.62) v1(96.82,18.08) v1(96.82,15.54) v1(96.82,13) v1(96.82,10.46) v1(96.82,7.92) v1(96.82,5.38)
A: length 40
  TOP w0.127: AND8.1 v1(55.88,24.48) 55.88,26.73 30.42,26.73 30.42,34.29 U136.9
ARISE: length 144.7
  TOP w0.127: v1(38.1,61.84) 35.85,61.84 35.85,37.78 31.43,37.78 31.43,39.94 33.59,39.94 33.59,47.56 29.65,47.56 29.65,46.04 14.61,46.04 U144.15 ; U138.1 43.81,55.56 42.61,55.56 ; U135.5 42.61,61.59 42.61,55.56 ; U131.1 41.72,95.89 41.72,70.42 36.2,70.42 36.2,65.09 38.1,65.09 ; 42.61,55.56 39.05,55.56 39.05,57.72 41.72,57.72 41.72,63.61 41.21,63.61 41.21,65.09 38.1,65.09 ; 38.1,65.09 v1(38.1,64.59)
  BOTTOM w0.127: v1(38.1,64.59) v1(38.1,61.84)
CLK: length 334.5
  TOP w0.127: 27.94,56.52 27.94,53.76 v1(1.23,53.76) ; U144.3 6.99,45.4 ; 6.99,45.4 15.56,45.4 15.56,42.86 14.61,42.86 ; 6.99,45.4 v1(1.23,45.4) ; v1(100.24,66.61) 94.55,66.61 94.55,66.99 78.99,66.99 78.99,71.12 STATEBUFF1.7 ; U144.13 14.61,42.86 ; 14.61,42.86 5.78,42.86 5.78,19.37 12.76,19.37 12.76,24.07 17.59,24.07 17.59,21.02 24.45,21.02 24.45,23.18 31.75,23.18 U146.1
  BOTTOM w0.127: v1(100.24,66.61) 100.74,66.61 100.74,99.5 1.23,99.5 v1(1.23,53.76) v1(1.23,45.4)
CLK_EN_OVERIDE: length 49.7
  TOP w0.127: U144.14 14.61,43.37 5.27,43.37 v1(5.27,31.24) 5.27,19.11 17.84,19.11 17.84,19.68 19.68,19.68
I0: length 24.5
  TOP w0.127: U137.11 38.39,85.09 38.39,94.17 28.89,94.17 v1(28.89,92.49) 28.89,90.81 U143.13
I1: length 41.8
  TOP w0.127: U143.5 26.61,83.19 26.61,86.93 29.4,86.93 29.4,93.92 38.14,93.92 v1(38.14,84.42) 38.14,82.55 U137.10
MEAS: length 80.8
  TOP w0.127: U139.1 19.68,23.69 v1(42.77,23.69) 53.66,23.69 53.66,21.27 59.55,21.27 59.55,31.2 57.09,31.2 57.09,29.91 41.72,29.91 41.72,36.2 40.01,36.2
N0: length 22.1
  TOP w0.127: IC11.14 62.29,68.58 62.29,62.17 v1(68.68,62.17) 75.56,62.17 STATEBUFF1.3
N1: length 24
  TOP w0.127: IC12.14 74.36,43.81 v1(74.36,51.72) 74.36,59.63 76.52,59.63 76.52,63.5 STATEBUFF1.4
N2: length 112.7
  TOP w0.127: IC13.14 63.5,42.61 77.28,42.61 77.28,45.63 80.12,45.63 80.12,44.77 82.49,44.77 82.49,46.93 89.85,46.93 89.85,49.72 78.63,49.72 78.63,59.25 94.3,59.25 94.3,60.24 v1(100.24,60.24) ; STATEBUFF1.5 77.03,66.04 77.03,61.53 100.24,61.53 v1(100.24,62.76)
  BOTTOM w0.127: v1(100.24,62.76) v1(100.24,60.24)
NARISE: length 144.9
  TOP w0.127: 43.81,36.2 42.48,36.2 42.48,37.66 39.05,37.66 39.05,41.27 U134.12 41.47,41.27 v1(41.47,43.02) 41.47,44.77 45.52,44.77 45.52,63.06 42.86,63.06 42.86,65.09 47.8,65.09 47.8,42.86 52.9,42.86 52.9,64.96 56.83,64.96 56.83,67.25 53.4,67.25 53.4,67.63 47.28,67.63 47.28,89.47 42.61,89.47 42.61,93.34 U131.2
NP: length 51.8
  TOP w0.127: 51.44,43.81 v1(49.75,43.81) 48.58,43.81 48.58,65.34 42.61,65.34 42.61,67.88 45.02,67.88 45.02,83.19 U131.6
NT: length 60.5
  TOP w0.127: U131.4 44.77,88.27 44.77,84.39 42.86,84.39 42.86,71.75 U135.1 44.77,71.75 44.77,68.14 42.35,68.14 42.35,64.83 42.48,64.83 42.48,62.8 45.02,62.8 v1(45.02,59.66) 45.02,59.05 ; 45.02,59.05 45.02,45.02 40.01,45.02 U134.13 ; 45.02,59.05 43.81,59.05
NX2: length 63
  TOP w0.127: IC11.3 57.59,68.58 57.59,64.45 54.22,64.45 54.22,42.61 46.79,42.61 46.79,64.14 v1(45.3,64.14) 43.81,64.14
NX3: length 13.3
  TOP w0.127: U135.3 v1(46.96,66.67) 50.1,66.67 50.1,65.72 54.93,65.72 54.93,66.04 IC11.4
NX5: length 41.9
  TOP w0.127: IC11.6 54.47,60.96 54.47,40.32 45.28,40.32 45.28,42.23 41.97,42.23 41.97,38.73 v1(41.24,38.73) U134.11
NY0: length 74.1
  TOP w0.127: IC12.1 67.94,51.43 v1(62.28,51.43) ; v1(60.78,51.43) 60.78,69.79 52.9,69.79 52.9,70.17 49.33,70.17 49.33,87.74 50.32,87.74 50.32,80.64 51.44,80.64 ; IC13.1 v1(55.88,51.43)
  BOTTOM w0.127: v1(55.88,51.43) v1(60.78,51.43) v1(62.28,51.43)
NY1: length 73
  TOP w0.127: IC12.2 66.03,46.35 66.03,47.56 54.93,47.56 54.93,50.94 54.97,50.94 v1(54.97,51.44) ; 51.44,90.81 48.82,90.81 48.82,68.14 54.42,68.14 54.42,67.5 57.09,67.5 57.09,64.71 53.72,64.71 v1(53.72,51.44)
  BOTTOM w0.127: v1(54.97,51.44) v1(53.72,51.44)
NY3: length 21.6
  TOP w0.127: IC12.4 66.03,41.27 66.03,39.69 59.3,39.69 59.3,37.66 53.15,37.66 v1(53.15,36.93) 53.15,36.2 51.44,36.2
NY4: length 254.2
  TOP w0.127: IC12.5 67.94,37.78 78.55,37.78 78.55,44.39 82.74,44.39 82.74,44.64 90.11,44.64 90.11,52.66 79.69,52.66 79.69,58.74 95.19,58.74 95.19,51.49 v1(99.75,51.49) ; v1(99.75,0.85) 18.73,0.85 18.73,18.1 29.53,18.1 29.53,16.19 39.37,16.19 39.37,17.14
  BOTTOM w0.127: v1(99.75,51.49) v1(99.75,0.85)
NY5: length 34
  TOP w0.127: IC12.6 65.98,36.2 65.98,37.4 61.07,37.4 61.07,37.15 53.91,37.15 53.91,34.99 48.58,34.99 v1(48.58,37.47) 48.58,39.94 43.81,39.94 U138.3
NZ2: length 96.6
  TOP w0.127: 39.37,12.06 40.58,12.06 40.58,15.56 37.32,15.56 37.32,15.44 v1(36.83,15.44) ; v1(36.83,24.43) 29.65,24.43 29.65,33.21 26.99,33.21 26.99,35.24 30.92,35.24 30.92,28.21 59.3,28.21 59.3,30.71 v1(57.78,30.71) ; v1(57.78,43.53) 57.29,43.53 57.29,43.81 IC13.3
  BOTTOM w0.127: v1(36.83,15.44) v1(36.83,24.43) ; v1(57.78,30.71) v1(57.78,43.53)
NZ3: length 7
  TOP w0.127: IC13.4 55.88,39.69 v1(53.4,39.69) 51.44,39.69 51.44,38.73
NZ5: length 21.6
  TOP w0.127: IC13.6 54.67,36.2 54.67,32.7 45.43,32.7 v1(45.43,38.73) U138.4
P: length 132.1
  TOP w0.127: 41.97,67.94 41.97,69.22 v1(42.61,69.22) ; 41.97,67.94 v1(36.69,67.94) ; 41.97,67.94 41.97,64.58 42.23,64.58 42.23,62.55 44.77,62.55 44.77,60.26 42.86,60.26 42.86,57.72 44.77,57.72 44.77,45.28 38.8,45.28 38.8,37.4 42.23,37.4 42.23,35.24 45.02,35.24 45.02,37.66 42.86,37.66 42.86,39.69 47.56,39.69 47.56,33.66 51.44,33.66 ; 43.81,85.72 42.61,85.72 v1(42.61,69.22) ; 20.32,64.14 25.08,64.14 25.08,60.26 29.91,60.26 29.91,57.59 34.1,57.59 34.1,67.45 34.09,67.45 v1(34.09,67.94) ; v1(42.61,69.22) 43.81,69.22
  BOTTOM w0.127: v1(36.69,67.94) v1(34.09,67.94)
Q0: length 54.7
  TOP w0.127: 51.44,13.14 48.32,13.14 48.32,16.07 42.86,16.07 42.86,18.35 53.66,18.35 v1(53.66,19.02) 53.66,19.68 55.88,19.68 ; 51.44,13.14 60.9,13.14 60.9,13.27 75.56,13.27 75.56,12.06 ; 51.44,13.14 51.44,12.06
Q1: length 38.9
  TOP w0.127: 64.71,15.56 v1(59.53,15.56) 55.88,15.56 55.88,17.14 ; 64.71,15.56 75.56,15.56 OUTPUTBUFF1.4 ; 64.71,15.56 64.71,13.53 59.37,13.53 59.37,13.4 51.44,13.4 U140.4
Q2: length 34.1
  TOP w0.127: AND8.4 54.67,14.61 v1(54.67,15.88) 54.67,17.14 ; 54.67,17.14 54.67,18.1 60.28,18.1 60.28,15.94 66.74,15.94 66.74,18.1 75.56,18.1 OUTPUTBUFF1.5 ; 54.67,17.14 U140.5
Q3: length 74.8
  TOP w0.127: v1(60.64,27.94) 60.64,20.89 51.44,20.89 51.44,20.64 ; OUTPUTBUFF1.6 72.69,19.68 v1(72.69,27.94) ; 43.81,20.64 42.61,20.64 42.61,15.81 46.55,15.81 46.55,11.11 55.88,11.11 55.88,12.06 ; 43.81,20.64 U140.10 ; 43.81,20.64 51.44,20.64 ; U140.6 51.44,20.64
  BOTTOM w0.127: v1(60.64,27.94) v1(72.69,27.94)
Q4: length 68.7
  TOP w0.127: 61.15,20.64 61.15,28.69 79.57,28.69 79.57,43.18 OUTPUTBUFF2.3 ; 61.15,20.64 52.9,20.64 52.9,18.73 43.81,18.73 43.81,19.68 ; 61.15,20.64 61.15,17.14 v1(61.82,17.14) 63.5,17.14
Q5: length 100.5
  TOP w0.127: 50.23,17.14 50.23,18.1 54.17,18.1 54.17,18.35 60.79,18.35 60.79,16.19 64.71,16.19 64.71,18.35 62.29,18.35 62.29,23.18 69.41,23.18 69.41,18.73 82.23,18.73 82.23,34.23 v1(81.28,34.23) 80.33,34.23 80.33,40.64 OUTPUTBUFF2.4 ; 50.23,17.14 43.81,17.14 ; 50.23,17.14 50.23,15.81 53.4,15.81 53.4,13.65 58.1,13.65 58.1,14.61 AND8.11
Q6: length 151.7
  TOP w0.127: U140.13 42.86,14.61 42.86,10.48 53.91,10.48 53.91,8.57 ; 53.91,8.57 47.05,8.57 47.05,8.19 37.91,8.19 37.91,1.11 88.71,1.11 88.71,13.53 82.99,13.53 82.99,38.1 OUTPUTBUFF2.5 ; 53.91,8.57 64.45,8.57 v1(64.45,10.32) 64.45,12.06 63.5,12.06
Q7: length 156.2
  TOP w0.127: 62.29,10.86 62.29,9.53 63.5,9.53 ; 62.29,10.86 43.81,10.86 43.81,12.06 ; 62.29,10.86 62.29,13.02 64.96,13.02 64.96,8.19 48.32,8.19 48.32,7.94 38.42,7.94 38.42,1.36 88.2,1.36 v1(88.2,7.32) 88.2,13.27 82.74,13.27 82.74,35.56 OUTPUTBUFF2.6
RST_CNT: length 86
  TOP w0.127: U136.11 29.15,39.37 v1(29.15,37.31) 29.15,35.75 26.73,35.75 26.73,32.96 28.89,32.96 28.89,26.72 18.48,26.72 18.48,21.27 22.42,21.27 22.42,23.43 42.1,23.43 42.1,23.18 ; 42.1,23.18 51.44,23.18 U140.7 ; 42.1,23.18 42.1,9.53 43.81,9.53
RST_IN: length 51.9
  TOP w0.127: U137.1 33.34,92.71 v1(33.34,90.9) 33.34,89.09 29.65,89.09 29.65,79.44 24.19,79.44 ; 24.19,79.44 24.19,80.64 U143.6 ; 24.19,79.44 24.19,65.15 32.38,65.15 32.38,64.14
S0: length 346.9
  TOP w0.127: U136.6 20.32,33.34 10.73,33.34 10.73,35.62 ; 39.05,37.15 38.54,37.15 38.54,59.05 41.47,59.05 41.47,63.11 40.01,63.11 ; 39.05,37.15 39.05,34.86 41.21,34.86 41.21,29.65 57.59,29.65 57.59,29.71 59.04,29.71 59.04,28.72 31.43,28.72 31.43,36.2 ; 39.05,37.15 41.97,37.15 41.97,30.16 56.83,30.16 56.83,31.46 59.9,31.46 ; U137.5 34.61,82.55 34.61,77.47 U137.8 40.96,77.47 40.96,70.68 35.94,70.68 35.94,63.11 40.01,63.11 ; v1(81.91,57.78) 90.61,57.78 90.61,44.39 82.99,44.39 82.99,44.13 79.06,44.13 79.06,36.2 IC12.11 72.2,36.2 72.2,28.94 60.9,28.94 60.9,28.72 59.9,28.72 59.9,31.46 ; 40.01,63.11 40.01,64.14 ; 10.73,35.62 10.73,36.83 U144.6 ; 10.73,35.62 25.08,35.62 25.08,41.91 U136.12 30.16,41.91 30.16,36.2 31.43,36.2 ; v1(81.91,66.24) 81.42,66.24 81.42,66.36 77.79,66.36 77.79,67.25 70.68,67.25 70.68,65.09 62.55,65.09 62.55,67.5 64.45,67.5 64.45,69.53 62.04,69.53 62.04,60.96 IC11.11 STATEBUFF1.14 ; IC13.11 62.42,36.2 62.42,31.46 59.9,31.46 ; 32.38,36.2 31.43,36.2
  BOTTOM w0.127: v1(81.91,57.78) v1(81.91,66.24)
S0CHANGE: length 54.4
  TOP w0.127: U134.3 32.38,42.86 24.07,42.86 24.07,35.88 14.61,35.88 U144.11 14.61,37.91 ; 14.61,37.91 v1(10.32,37.91) 6.03,37.91 6.03,22.86 U133.1 ; 14.61,37.91 U144.12
S1: length 243.1
  TOP w0.127: 35.43,72.47 35.43,62.55 40.96,62.55 40.96,60.52 37.8,60.52 37.8,33.66 ; 35.43,72.47 38.59,72.47 38.59,73.7 v1(38.1,73.7) ; 35.43,72.47 35.43,72.71 31.18,72.71 31.18,66.67 U132.3 ; 66.99,38.73 66.99,37.4 69.41,37.4 69.41,29.21 v1(60.4,29.21) ; 66.99,38.73 66.99,39.69 75.56,39.69 ; 66.99,38.73 IC13.12 ; v1(38.1,79.21) 38.1,80.01 U137.9 41.21,80.01 41.21,87.63 U137.12 ; 75.56,39.69 78.04,39.69 78.04,44.88 v1(79.38,44.88) ; 75.56,39.69 IC12.12 ; v1(58.55,29.21) 40.01,29.21 40.01,31.11 37.8,31.11 37.8,33.66 ; 37.8,33.66 U134.6 ; v1(99.75,62.03) 99.25,62.03 99.25,61.91 87.31,61.91 87.31,64.45 ; 87.31,64.45 77.53,64.45 77.53,66.99 72.71,66.99 72.71,63.5 STATEBUFF1.13 IC11.12 ; 87.31,64.45 87.31,65.41 IC10.13 ; v1(99.75,58.99) 79.38,58.99 v1(79.38,50.64)
  BOTTOM w0.127: v1(99.75,58.99) v1(99.75,62.03) ; v1(60.4,29.21) v1(58.55,29.21) ; v1(79.38,44.88) v1(79.38,50.64) ; v1(38.1,73.7) v1(38.1,79.21)
S2: length 340.2
  TOP w0.127: 64.96,67.5 64.96,69.79 61.79,69.79 61.79,50.84 65.52,50.84 65.52,49.85 62.29,49.85 62.29,47.82 66.54,47.82 66.54,47.56 69.15,47.56 69.15,45.4 65.52,45.4 65.52,47.31 62.29,47.31 62.29,42.23 63.5,42.23 ; 64.96,67.5 64.96,66.04 ; 64.96,67.5 78.3,67.5 78.3,66.74 89.22,66.74 89.22,66.12 ; 88.27,62.87 89.22,62.87 89.22,66.12 ; IC11.13 64.96,66.04 ; 64.96,66.04 STATEBUFF1.12 ; U132.5 31.43,61.59 ; 31.43,61.59 31.43,62.8 26.61,62.8 26.61,64.9 23.05,64.9 23.05,65.34 17.34,65.34 17.34,63.18 13.4,63.18 13.4,81.83 17.31,81.83 17.31,98.36 v1(100.24,98.36) ; 31.43,61.59 31.43,58.1 33.59,58.1 33.59,65.66 26.48,65.66 26.48,76.77 31.43,76.77 31.43,80.01 U137.6 ; 89.22,66.12 100.74,66.12 100.74,67.35 v1(100.24,67.35) ; 63.5,42.23 75.56,42.23 IC12.13 ; 63.5,42.23 IC13.13
  BOTTOM w0.127: v1(100.24,67.35) v1(100.24,98.36)
SB0: length 51.2
  TOP w0.127: 80.64,67.94 79.69,67.94 79.69,71.69 81.85,71.69 81.85,74.87 55.88,74.87 IC11.1 ; 51.44,83.19 52.9,83.19 52.9,76.63 v1(55.88,76.63)
  BOTTOM w0.127: v1(55.88,76.63) IC11.1
SB1: length 115.3
  TOP w0.127: 88.27,67.94 100.24,67.94 100.24,71.44 85.15,71.44 85.15,75.63 56.63,75.63 ; 51.44,93.34 51.44,92.27 42.86,92.27 42.86,89.85 45.28,89.85 v1(45.28,90.55) 45.28,91.76 53.4,91.76 53.4,77.38 56.63,77.38 56.63,75.63 ; 56.63,75.63 54.42,75.63 54.42,71.12 IC11.2
SB2: length 177
  TOP w0.127: v1(30.3,2.35) 30.3,10.73 35.32,10.73 35.32,14.61 U146.11 ; v1(99.25,68.67) 98.76,68.67 98.76,68.9 80.64,68.9 IC10.2
  BOTTOM w0.127: v1(30.3,2.35) 99.25,2.35 v1(99.25,68.67)
SB4: length 320.8
  TOP w0.127: 39.37,19.68 39.37,20.64 29.53,20.64 29.53,18.35 18.48,18.35 18.48,0.36 v1(100.74,0.36) ; v1(99.75,69.41) 83.63,69.41 83.63,75.12 54.93,75.12 54.93,72.71 58.1,72.71 58.1,74.61 64.45,74.61 64.45,72.57 ; IC10.1 79.69,73.03 79.69,72.57 64.45,72.57 ; 64.45,72.57 61.28,72.57 61.28,50.69 57.09,50.69 57.09,63.5 IC11.5
  BOTTOM w0.127: v1(100.74,0.36) 100.74,64.78 99.75,64.78 v1(99.75,69.41)
T: length 261.2
  TOP w0.127: v1(99.5,72.07) 86.42,72.07 86.42,76.38 v1(78.74,76.38) 78.74,77.89 53.91,77.89 53.91,92.01 43.81,92.01 U131.3 ; 58.28,40.32 58.28,46.35 IC13.2 ; 58.28,40.32 v1(64.77,40.32) ; 58.28,40.32 58.28,38.73 IC13.5 v1(53.97,38.73) 52.64,38.73 52.64,37.66 50.23,37.66 50.23,35.24 53.66,35.24 53.66,37.4 60.31,37.4 60.31,37.66 66.48,37.66 66.48,37.15 68.9,37.15 68.9,35.24 65.21,35.24 65.21,37.15 61.84,37.15 61.84,32.32 51.44,32.32 ; IC12.3 67.94,45.02 v1(64.77,45.02) ; v1(78.74,72.07) 61.53,72.07 61.53,50.34 v1(64.77,50.34) ; J2.4 v1(99.5,89.53) ; 51.44,32.32 43.81,32.32 U138.6 ; 51.44,32.32 51.44,31.11 ; v1(53.97,41.27) 45.78,41.27 45.78,43.81 U138.2
  BOTTOM w0.127: v1(99.5,72.07) v1(99.5,89.53) ; v1(78.74,72.07) v1(78.74,76.38) ; v1(64.77,50.34) v1(64.77,45.02) v1(64.77,40.32) ; v1(53.97,41.27) v1(53.97,38.73)
VREF: length 147.3
  TOP w0.127: 93.34,91.12 95.82,91.12 95.82,98.11 18.07,98.11 18.07,70.8 21.27,70.8 21.27,74.99 v1(20.07,74.99) 18.86,74.99 18.86,85.72 U143.4 ; 93.34,91.12 C7.2 ; 93.34,91.12 93.34,92.08 J2.5
WR: length 324.2
  TOP w0.127: 80.07,33.02 80.07,22.23 OUTPUTBUFF1.7 ; 80.07,33.02 OUTPUTBUFF2.7 ; 80.07,33.02 80.07,41.85 83.25,41.85 83.25,44.13 101.24,44.13 101.24,99.11 16.29,99.11 16.29,87.34 12.51,87.34 12.51,89.19 6.06,89.19 6.06,81.83 8.45,81.83 8.45,55.31 26.5,55.31 26.5,58.1 29.15,58.1 29.15,60.01 24.32,60.01 24.32,63.06 19.11,63.06 19.11,65.09 22.03,65.09 22.03,64.64 25.84,64.64 25.84,60.52 30.67,60.52 30.67,57.85 33.85,57.85 33.85,66.67 33.59,66.67 v1(33.59,67.18) 33.59,69.22 32.38,69.22
Y0: length 19.1
  TOP w0.127: 67.94,12.06 67.94,10.73 v1(75.95,10.73) 84.45,10.73 J1.1
Y1: length 24.1
  TOP w0.127: OUTPUTBUFF1.13 67.94,13.53 77.97,13.53 77.97,10.99 v1(85.02,10.99) 87,10.99 J1.2
Y2: length 21.6
  TOP w0.127: 67.94,17.14 67.94,16.07 79.31,16.07 79.31,12.06 v1(81.88,12.06) 84.45,12.06
Y3: length 22.2
  BOTTOM w0.127: 87,12.06 85.72,13.34 83.19,13.34 78.11,18.41 73.66,18.41 72.39,19.68 v1(70.17,19.68) 67.94,19.68
Y4: length 34.9
  TOP w0.127: J1.5 83.5,14.61 v1(83.5,28.89) 83.5,43.18 OUTPUTBUFF2.14
Y5: length 30.4
  TOP w0.127: OUTPUTBUFF2.13 90.11,40.64 90.11,14.61 v1(88.55,14.61) J1.6
Y6: length 25.4
  TOP w0.127: J1.7 v1(84.45,27.62) 84.45,38.1 OUTPUTBUFF2.12
Y7: length 20.3
  TOP w0.127: J1.8 v1(87,26.35) 87,35.56 OUTPUTBUFF2.11
N01906: length 71.2
  TOP w0.127: U143.8 30.66,78.11 30.66,86.36 v1(37.64,86.36) ; 54.67,94.3 54.67,94.55 42.1,94.55 42.1,86.85 42.21,86.85 v1(42.21,86.36) ; 54.67,94.3 64.14,94.3 ; 54.67,94.3 54.67,85.09 U142.2 ; 64.14,94.3 R1.1 ; 64.14,94.3 69.22,94.3 C1.1
  BOTTOM w0.127: v1(42.21,86.36) v1(37.64,86.36)
N01917: length 113.4
  TOP w0.127: U143.9 27.94,81.85 19.11,81.85 19.11,84.65 21.53,84.65 21.53,86.93 19.37,86.93 19.37,92.01 23.81,92.01 23.81,97.35 65.66,97.35 65.66,95.31 70.42,95.31 70.42,92.14 66.29,92.14 66.29,92.2 62.24,92.2 62.24,90.68 ; U142.1 55.88,90.68 ; 55.88,90.68 R4.1 ; 55.88,90.68 62.24,90.68 ; 62.24,90.68 66.29,90.68 66.29,90.81 v1(67.75,90.81) C1.2
N29993: length 46.2
  TOP w0.127: R1.2 56.52,97.09 25.08,97.09 25.08,90.81 v1(22.7,90.81) U143.2 U143.3
N201913: length 105.4
  TOP w0.127: 75.06,95.25 v1(77.22,95.25) R3.1 ; 75.06,95.25 75.06,97.6 22.54,97.6 22.54,92.27 18.61,92.27 18.61,71.75 U141.1 ; 75.06,95.25 74.3,95.25 74.3,87.63 U147.1
N291780: length 25.7
  TOP w0.127: 66.99,85.09 v1(66.99,86.33) 66.99,89.09 72.2,89.09 72.2,96.52 R5.2 ; 66.99,85.09 66.99,82.55 U147.3 ; 66.99,85.09 U142.7
N294365: length 34.5
  TOP w0.127: 70.17,91.76 64.26,91.76 64.26,91.44 R4.2 ; 70.17,91.76 70.93,91.76 v1(70.93,94.14) 70.93,96.52 R5.1 ; 70.17,91.76 70.17,89.6 65.72,89.6 65.72,86.3 62.55,86.3 62.55,82.55 U142.6
N364495: length 15.9
  TOP w0.127: U136.1 20.32,48.2 v1(13.65,48.2) 6.99,48.2 U144.1
N364545: length 16.5
  TOP w0.127: U134.1 32.38,45.4 22.03,45.4 v1(22.03,43.66) 22.03,41.91 U136.3
N364621: length 79.6
  TOP w0.127: U144.5 6.99,40.58 18.08,40.58 18.08,44.45 U136.2 20.32,45.66 30.67,45.66 v1(30.67,46.48) 30.67,47.31 33.34,47.31 33.34,40.2 30.92,40.2 30.92,37.53 36.87,37.53 36.87,61.09 39.05,61.09 39.05,61.59 U132.10
N364729: length 16.5
  TOP w0.127: U136.4 v1(21.81,39.37) 23.29,39.37 23.29,43.31 31.43,43.31 31.43,43.81 U134.2
N365115: length 15.9
  TOP w0.127: U144.10 14.61,35.24 25.84,35.24 25.84,36.83 v1(26.64,36.83) U136.10
N365523: length 46.1
  BOTTOM w0.127: U137.3 29.84,85.09 29.84,44.58 29.72,44.45 U136.13
N365667: length 58.2
  TOP w0.127: U137.2 31.18,90.17 31.18,93.66 33.85,93.66 33.85,88.58 30.15,88.58 30.15,79.06 25.97,79.06 v1(25.97,72.23) 25.97,65.41 33.34,65.41 33.34,59.05 32.38,59.05
N365843: length 93.6
  TOP w0.127: U134.9 38.29,33.66 v1(38.29,36.54) 38.29,60.26 41.21,60.26 41.21,62.8 35.69,62.8 35.69,71.69 38.85,71.69 38.85,74.19 29.65,74.19 29.65,70.8 26.99,70.8 26.99,75.46 33.59,75.46 33.59,81.22 31.18,81.22 31.18,85.09 U137.4
N366199: length 86.5
  TOP w0.127: v1(38.1,65.58) 41.72,65.58 41.72,64.07 41.97,64.07 41.97,56.52 40.01,56.52 ; U137.13 39.05,90.17 39.05,86.3 40.96,86.3 40.96,81.6 36.39,81.6 36.39,86.04 30.92,86.04 30.92,80.96 33.34,80.96 33.34,76.21 26.73,76.21 26.73,70.55 30.42,70.55 30.42,72.96 v1(38.1,72.96)
  BOTTOM w0.127: v1(38.1,65.58) v1(38.1,72.96)
N383512: length 14.5
  TOP w0.127: 39.37,6.99 39.37,5.78 v1(45.15,5.78) 51.44,5.78 U140.1
N414529: length 37.4
  TOP w0.127: U132.1 v1(33.99,71.75) 34.58,71.75 34.58,38.73 U134.4
N426095: length 41.3
  TOP w0.127: 19.68,17.14 19.68,15.94 v1(28.99,15.94) 41.34,15.94 41.34,8.57 45.78,8.57 45.78,9.53 U140.2
N434393: length 37.5
  TOP w0.127: 20.32,59.05 20.32,60.26 v1(14.64,60.26) 8.95,60.26 8.95,83.19 U145.3
N449503: length 2.5
  TOP w0.127: 20.32,69.22 v1(20.32,67.94) U141.3
N452189: length 50.2
  TOP w0.127: 27.94,59.05 23.04,59.05 23.04,62.8 10.73,62.8 10.73,88.27 v1(8.86,88.27) U145.1
N453800: length 47.4
  TOP w0.127: U136.5 v1(18.7,36.83) 18.7,40.32 10.73,40.32 10.73,38.42 6.03,38.42 6.03,40.83 16.07,40.83 16.07,45.66 6.99,45.66 U144.2
N497810: length 40.8
  TOP w0.127: R7.2 86.11,92.08 ; 86.11,92.08 86.11,86.02 86.36,86.02 v1(86.36,82.76) R6.3 ; 86.11,92.08 86.11,93.28 75.5,93.28 75.5,89.85 74.55,89.85 74.55,85.09 U147.2
N501202: length 2.5
  TOP w0.127: 31.75,17.14 v1(31.75,18.41) 31.75,19.68
N521218: length 13.2
  TOP w0.127: Y1.5 14.61,57.72 v1(18.07,57.72) 21.53,57.72 21.53,61.59 U141.5
N4034561: length 32.4
  TOP w0.127: U136.8 v1(27.94,30.12) 11.49,30.12 11.49,20.32 U133.2
N4911441: length 2.5
  TOP w0.127: 31.75,12.06 v1(31.75,13.34) U146.4
N4912191: length 7.6
  TOP w0.127: 31.75,9.53 v1(35.56,9.53) 39.37,9.53

## Copper pours and planes (outline as drawn; the poured copper is in the pictures)
0 on BOTTOM: 2.54,99.06 2.54,2.54 99.06,2.54 99.06,99.06

## Text on the board
BOTTOM: Y7
Ref Des/Silkscreen Top: Y6 | Y4 | Y2 | Y0 | Y7 | Y5 | Y3 | Y1 | VRE | GND | +5V | VIN | -5V | EN
